# Altium PCB PCB1.PcbDoc
Units mil, origin at the board's own origin, x right, y up, seen from the top; angles counter-clockwise.
Board outline 1989.03 x 1762.03 mil, 2 copper layers (Top Layer, Bottom Layer); 10 components, 18 nets, 219 pads, 0 vias.
Unrouted connection lines stored in the file: 1.
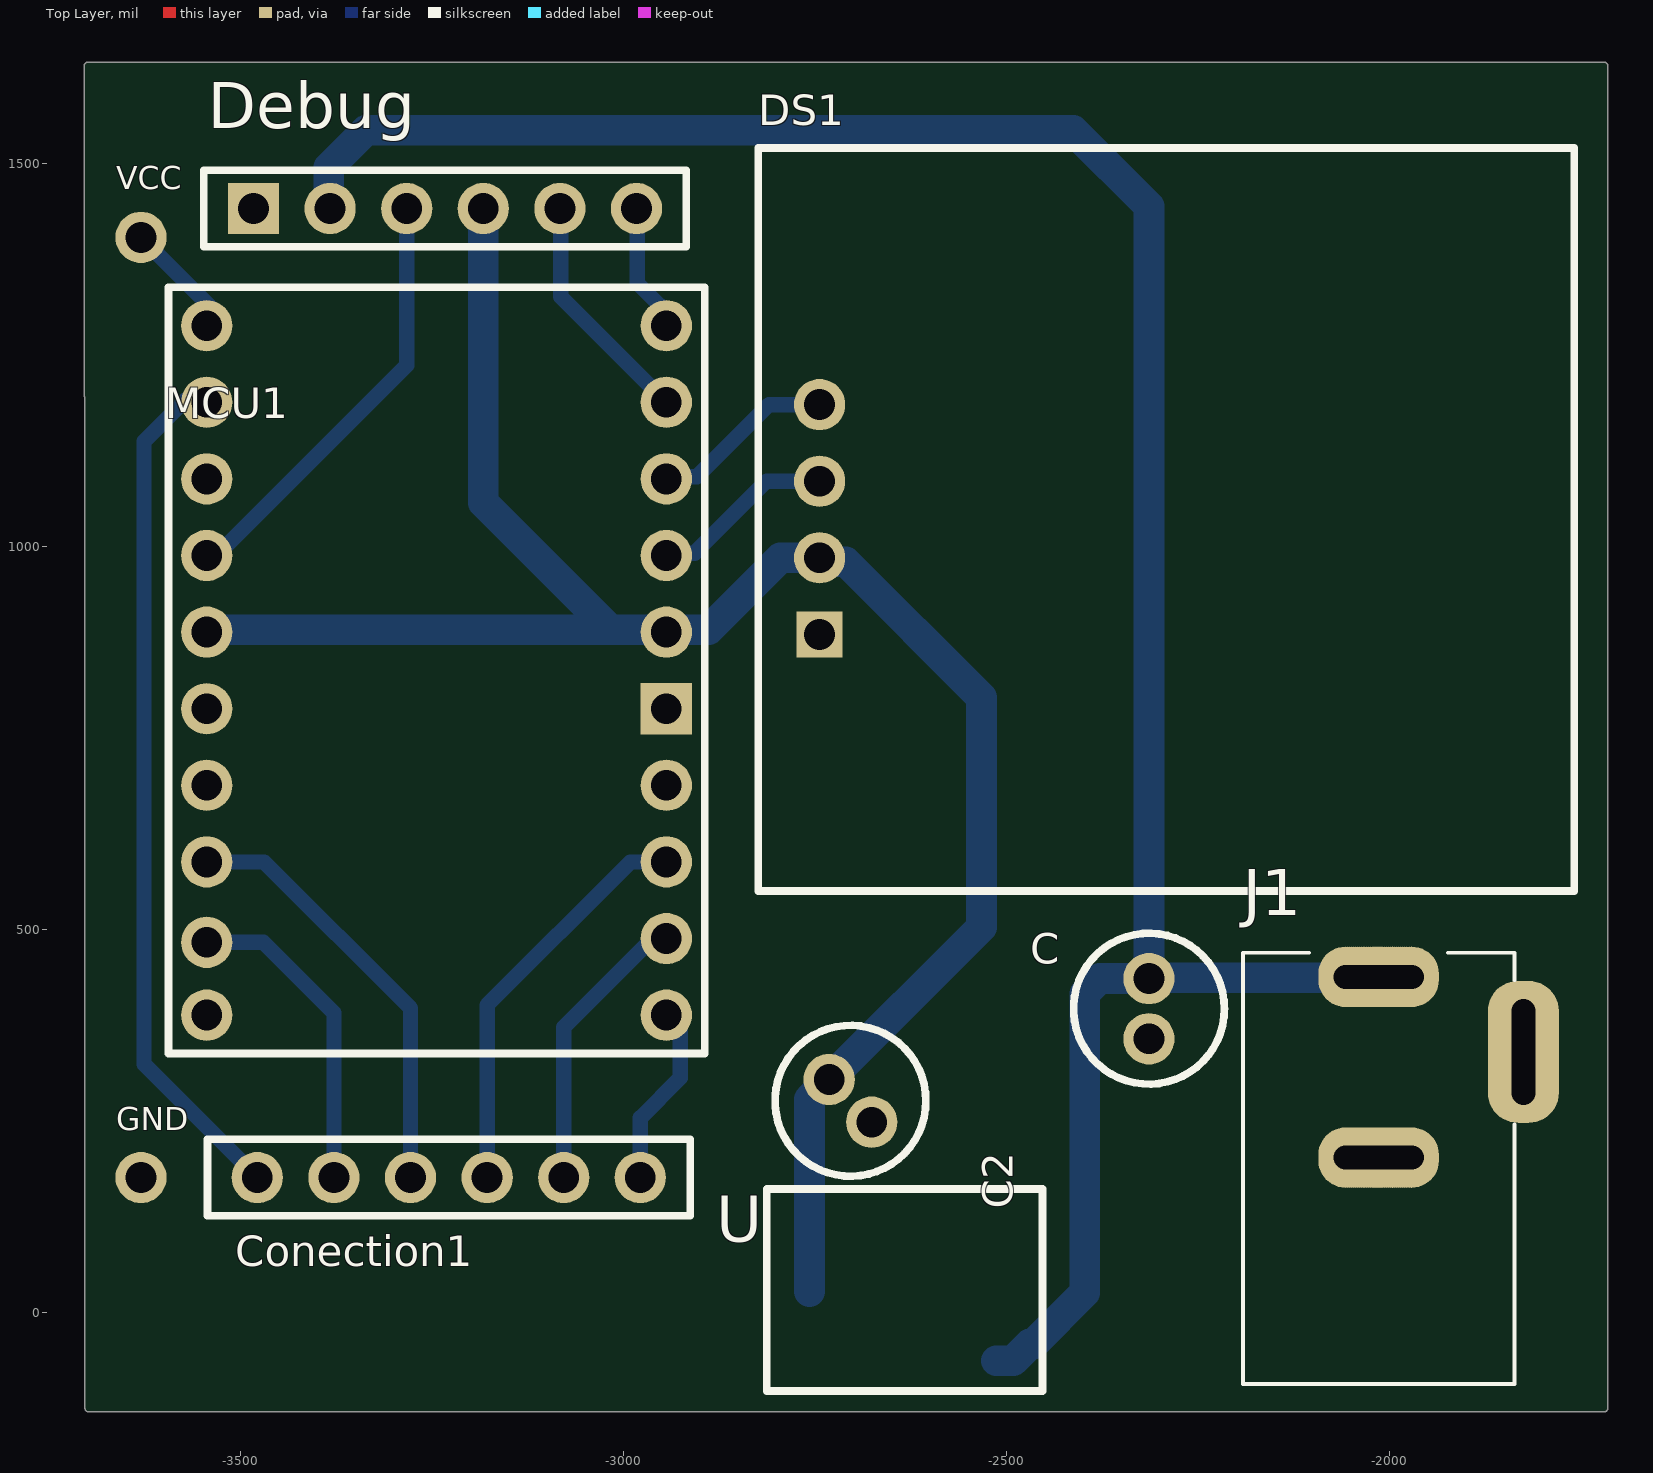
[diagram p0: Top Layer view]
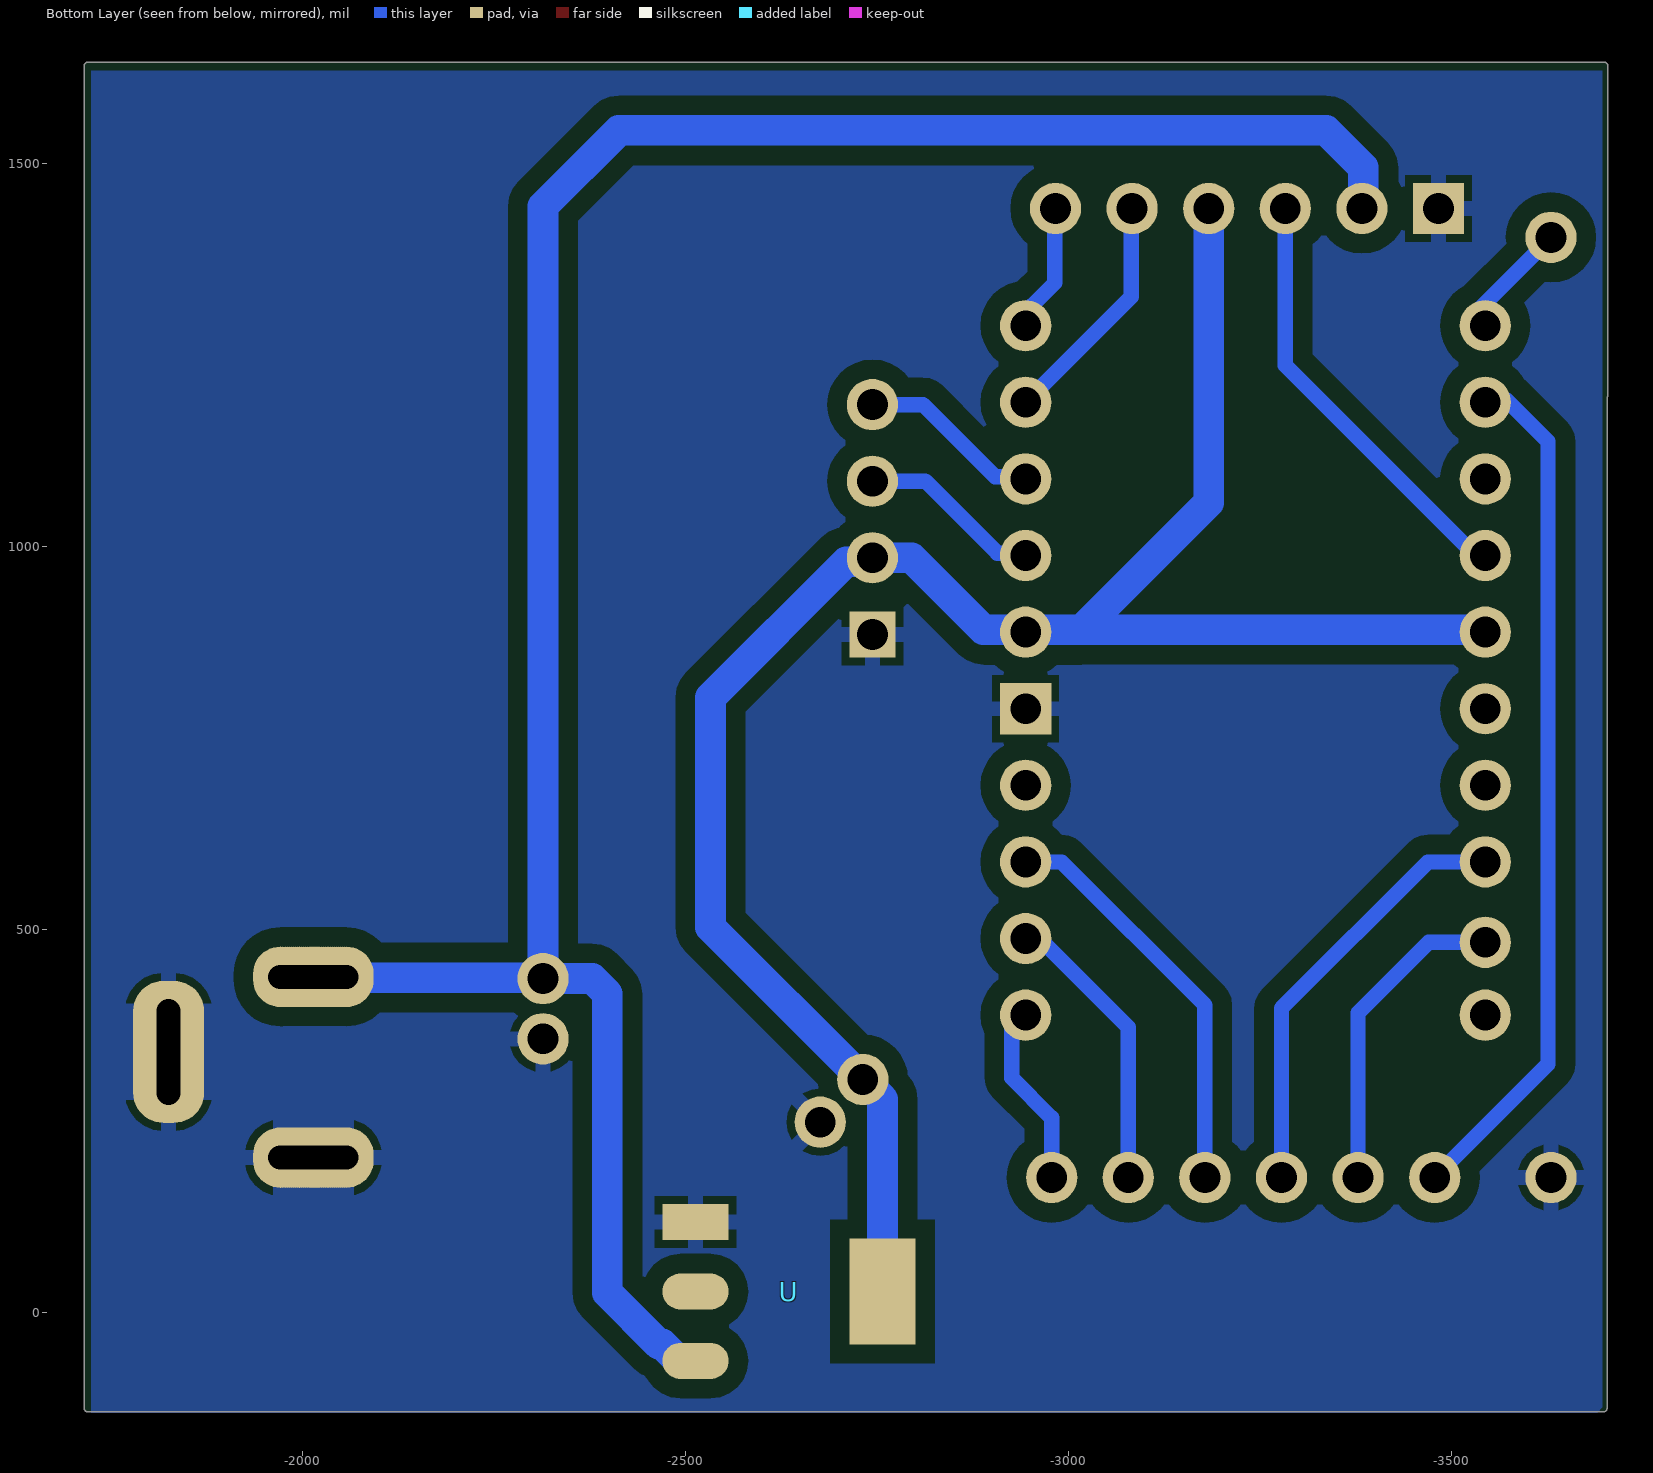
[diagram p1: Bottom Layer view, seen from below]
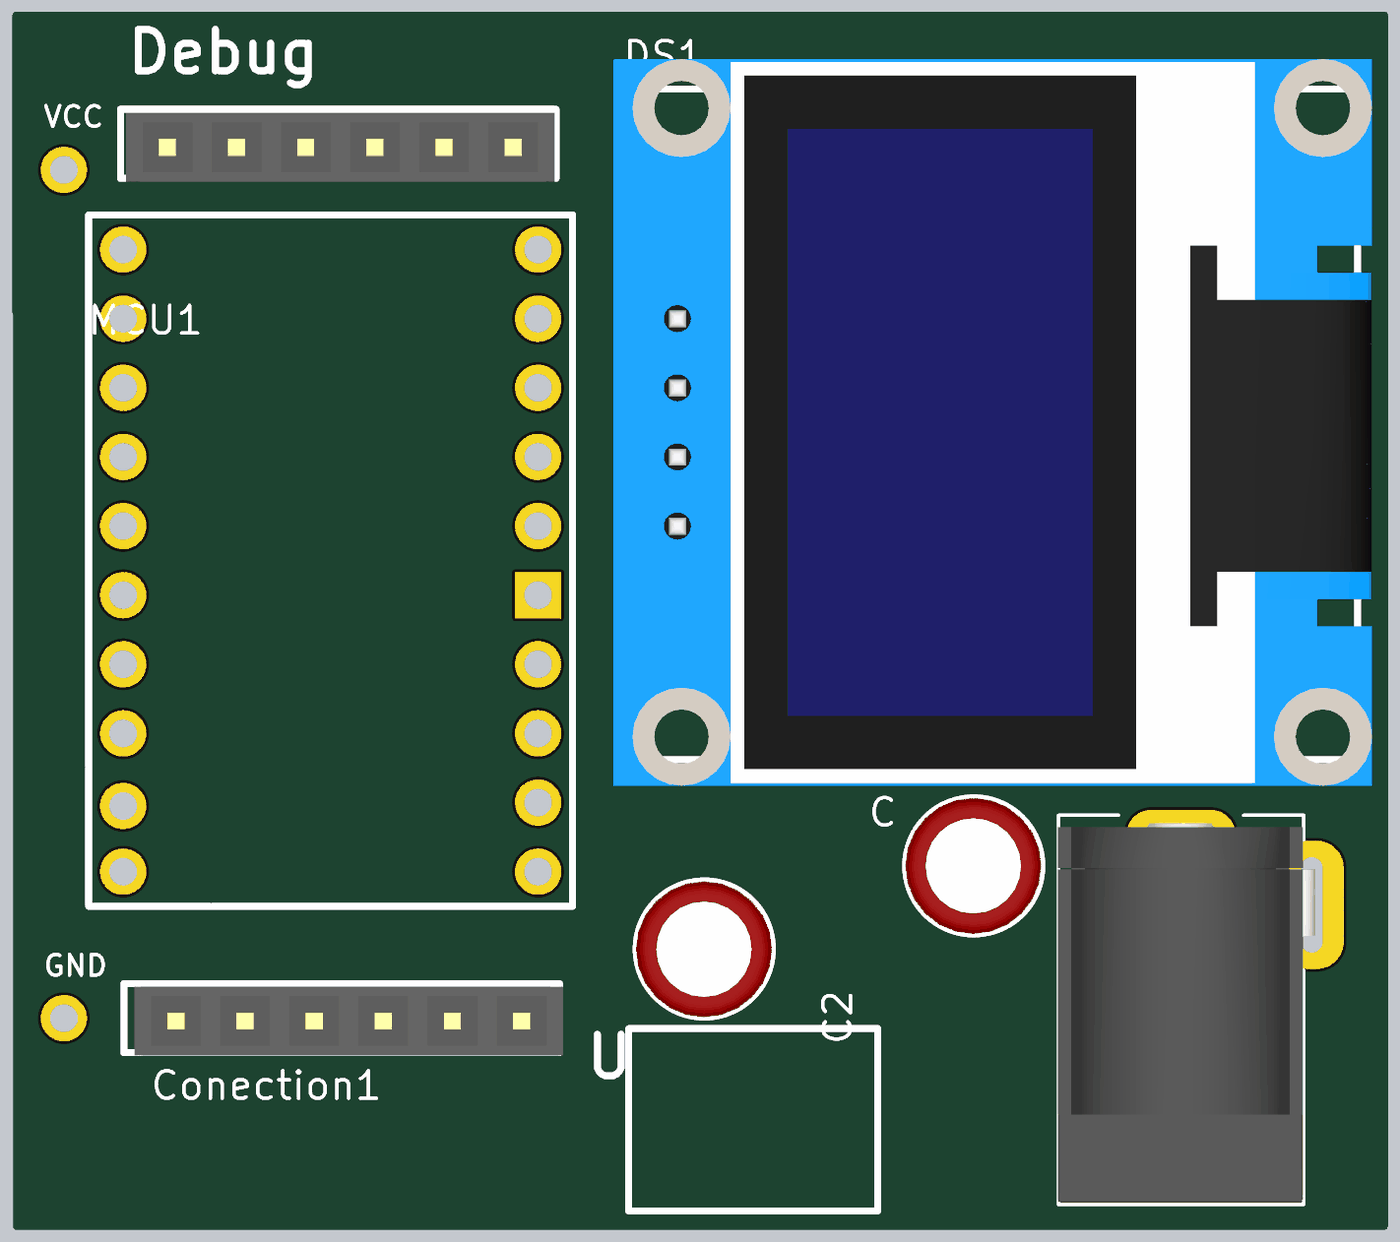
[diagram p2: 3D render of the assembled board from above, using the file's embedded part models]

## Layer stack, top to bottom
Top Solder: solder mask 0.4, Solder Resist, Dk 3.5
Top Layer: signal copper 1.4
Dielectric 1: dielectric 12.6, FR-4, Dk 4.8
Bottom Layer: signal copper 1.4
Bottom Solder: solder mask 0.4, Solder Resist, Dk 3.5

## Board outline
-3703.01,-125 -3703.01,1193.99 cw(c-3699,1197) -3704.01,1197 -3704.01,1627 cw(c-3699,1627) -3699,1632.02 -1720,1632.02 cw(c-1720,1627) -1714.98,1627 -1714.98,-125 cw(c-1720,-125) -1720,-130.01 -3698,-130.01 cw(c-3698,-125)

## Design rules (kind name [scope] priority, off if disabled: settings)
Clearance [All] p1: gap=25 ignorepadtopadclearanceinfootprint=TRUE
HoleToHoleClearance [Not InComponent('J1')] p1: gap=10 allowstackedmicrovias=TRUE
PlaneConnect [InNet('GND')] p1: planeconnectstyle=Relief reliefexpansion=20 reliefentries=4 reliefconductorwidth=20 reliefairgap=10
PolygonConnect [InNet('GND') vs InNet('GND')] p1: connectstyle=Relief reliefconductorwidth=20 reliefentries=4 polygonreliefangle="90 Angle" airgapwidth=10
RoutingVias [All] p1: holewidth=28 width=50 viastyle="Through Hole" minholewidth=28 minwidth=50 maxholewidth=28 maxwidth=50
SolderMaskExpansion [All] p1: expansion=4 istentingtop=FALSE
Width [All] p1: maxlimit=50 minlimit=10 preferedwidth=10 minimp=50.000000 maximp=50.000000 favimp=50.000000
28 further rules are at their usual default settings.

## Components (designator, comment, footprint, x,y, rotation, side; value= is the part's Value field where it differs from the comment)
C "Capacitor Eletrolítico" CAPACITOR -2314,435.74 r270 top value="R$: 0.70 /5 unidades"
C2 "22uF" Capacitor -2731.52,303.99 r315 top value="R$: 0.70 /5 unidades"
Conection1 "Conectionwires" CONECTIONWIRES -2908,216 r180 top
Debug "Debugwires" DEBUGWIRES -2913,1496 r180 top
DS1 "Display 0.96 pol" "DISPLAY OLED" -2744,885 r90 top
GND "Pad" PAD -3629.82,176 r90 top
J1 "DC-005" NINIGI_DC-005 -2189.37,-94 r90 top
MCU1 "Processor" PROCESSOR -3544,388 r0 top
U "AZ1117" AZ1117 -2513,-63.35 r90 top
VCC "Pad" PAD -3629.81,1403.23 r90 top

## Footprints (in the part's own frame and the unit in brackets; to place one, negate y for a bottom-side part, rotate by r counter-clockwise, add the part's x,y. Pads: shape width x height; smd on the part's side, far side on the other; paste and mask are expansions set on the pad)
AZ1117 [mm]
  rect 1.2x2.2 smd far side: GND(4.6,0)
  oval 1.2x2.2 smd far side: V-IN(0,0) V-OUT-1(2.3,0)
  rect 3.5x2.2 smd far side: V-OUT(2.3,6.2)
  silkscreen extent -1,-1.52 5.7,7.62, body extent -0.84,-0.43 5.66,6.57
CAPACITOR [mm]
  round 1.7 hole 1.016: +(0,0) -(2,0)
  silkscreen extent -1.5,-2.5 3.5,2.5, body extent -1.5,-2.51 3.5,2.49, height 11
Capacitor [mm]
  round 1.7 hole 1.016: +(0,0) -(2,0)
  silkscreen extent -1.5,-2.5 3.5,2.5, body extent -1.5,-2.51 3.5,2.49, height 11
CONECTIONWIRES [mm]
  round 1.7 hole 1.02: PA2(9.398,1.016) PA3(11.938,1.016) PA5(1.778,1.016) PA6(4.318,1.016) PA7(6.858,1.016) PF-0(14.478,1.016)
  silkscreen extent 0.13,-0.25 16.13,2.29, body extent 0,-0.15 15.74,2.39, height 8.5
DEBUGWIRES [mm]
  round 1.7 hole 1.02: 3v3(6.858,1.397) PA13(4.318,1.397) PA14(1.778,1.397) RESET(9.398,1.397) VCC(11.938,1.397)
  rect 1.7x1.7 hole 1.02: GND(14.478,1.397)
  silkscreen extent 0.13,0.13 16.13,2.67, body extent 0.18,0.25 15.92,2.79, height 8.5
"DISPLAY OLED" [mm] "24.7x27"
  rect 1.524x1.524 hole 1.02: GND(0,0)
  round 1.7 hole 1.02: SCK(5.08,0) SDA(7.62,0) VCC(2.54,0)
  silkscreen extent -8.51,-25.02 16.13,2.03, body extent -9.46,-25.55 17.24,2.31, height 5.47
NINIGI_DC-005 [mm]
  oval 2x2.35 hole 0.8: 2(9.667,-9.25) 2(9.738,-9.25) 2(9.81,-9.25) 2(9.882,-9.25) 2(9.946,-9.25) 2(10.018,-9.25) 2(10.09,-9.25) 2(10.162,-9.25) 2(10.225,-9.25) 2(10.297,-9.25) 2(10.369,-9.25) 2(10.441,-9.25) 2(10.505,-9.25) 2(10.577,-9.25) 2(10.649,-9.25) 2(10.721,-9.25) 2(10.784,-9.25) 2(10.856,-9.25) 2(10.928,-9.25) 2(11,-9.25) 2(11.064,-9.25) 2(11.135,-9.25) 2(11.207,-9.25) 2(11.279,-9.25) 2(11.343,-9.25) 2(11.415,-9.25) 2(11.487,-9.25) 2(11.559,-9.25) 2(11.622,-9.25) 2(11.694,-9.25) 2(11.766,-9.25) 2(11.838,-9.25) 2(11.902,-9.25) 2(11.974,-9.25) 2(12.046,-9.25) 2(12.118,-9.25) 2(12.181,-9.25) 2(12.253,-9.25) 2(12.329,-9.25) 2(12.355,-9.25) 2(12.38,-9.25)
  oval 2x1.8 hole 0.8: 3(7.518,-5.546) 3(7.518,-5.525) 3(7.518,-5.457) 3(7.518,-5.457) 3(7.518,-5.389) 3(7.518,-5.389) 3(7.518,-5.321) 3(7.518,-5.321) 3(7.518,-5.253) 3(7.518,-5.253) 3(7.518,-5.185) 3(7.518,-5.185) 3(7.518,-5.117) 3(7.518,-5.117) 3(7.518,-5.049) 3(7.518,-5.049) 3(7.518,-4.981) 3(7.518,-4.913) 3(7.518,-4.9) 3(7.518,-4.832) 3(7.518,-4.764) 3(7.518,-4.764) 3(7.518,-4.696) 3(7.518,-4.696) 3(7.518,-4.628) 3(7.518,-4.628) 3(7.518,-4.586) 3(7.518,-4.56) 3(7.518,-4.56) 3(7.518,-4.518) 3(7.518,-4.492) 3(7.518,-4.492) 3(7.518,-4.45) 3(7.518,-4.45) 3(7.518,-4.424) 3(7.518,-4.424) 3(7.518,-4.381) 3(7.518,-4.381) 3(7.518,-4.356) 3(7.518,-4.313) 3(7.518,-4.313) 3(7.518,-4.288) 3(7.518,-4.245) 3(7.518,-4.245) 3(7.518,-4.177) 3(7.518,-4.177) 3(7.518,-4.109) 3(7.518,-4.109) 3(7.518,-4.041) 3(7.518,-3.973) 3(7.518,-3.961) 3(7.518,-3.893) 3(7.518,-3.825) 3(7.518,-3.825) 3(7.518,-3.757) 3(7.518,-3.756) 3(7.518,-3.689) 3(7.518,-3.689) 3(7.518,-3.621) 3(7.518,-3.62) 3(7.518,-3.552) 3(7.518,-3.552) 3(7.518,-3.484) 3(7.518,-3.484) 3(7.518,-3.416) 3(7.518,-3.348) 4(13.513,-5.546) 4(13.513,-5.525) 4(13.513,-5.457) 4(13.513,-5.457) 4(13.513,-5.389) 4(13.513,-5.389) 4(13.513,-5.321) 4(13.513,-5.321) 4(13.513,-5.253) 4(13.513,-5.253) 4(13.513,-5.185) 4(13.513,-5.185) 4(13.513,-5.117) 4(13.513,-5.117) 4(13.513,-5.049) 4(13.513,-5.049) 4(13.513,-4.981) 4(13.513,-4.913) 4(13.513,-4.9) 4(13.513,-4.832) 4(13.513,-4.764) 4(13.513,-4.764) 4(13.513,-4.696) 4(13.513,-4.696) 4(13.513,-4.628) 4(13.513,-4.628) 4(13.513,-4.586) 4(13.513,-4.56) 4(13.513,-4.56) 4(13.513,-4.518) 4(13.513,-4.492) 4(13.513,-4.492) 4(13.513,-4.45) 4(13.513,-4.45) 4(13.513,-4.424) 4(13.513,-4.424) 4(13.513,-4.381) 4(13.513,-4.381) 4(13.513,-4.356) 4(13.513,-4.313) 4(13.513,-4.313) 4(13.513,-4.288) 4(13.513,-4.245) 4(13.513,-4.245) 4(13.513,-4.177) 4(13.513,-4.177) 4(13.513,-4.109) 4(13.513,-4.109) 4(13.513,-4.041) 4(13.513,-3.973) 4(13.513,-3.961) 4(13.513,-3.893) 4(13.513,-3.825) 4(13.513,-3.825) 4(13.513,-3.757) 4(13.513,-3.756) 4(13.513,-3.689) 4(13.513,-3.689) 4(13.513,-3.621) 4(13.513,-3.62) 4(13.513,-3.552) 4(13.513,-3.552) 4(13.513,-3.484) 4(13.513,-3.484) 4(13.513,-3.416) 4(13.513,-3.348)
  silkscreen extent 0.01,-8.95 14.31,0.05, body extent 0.09,-9.37 14.02,0.08, height 11.2
PAD [mm] "A simple pad to connections"
  round 1.7 hole 1.02: Pad(0,0)
PROCESSOR [mm]
  round 1.7 hole 1.02: 3v3(0,12.7) 3v3(15.24,12.7) BOOT0(0,22.86) NRST(0,15.24) PA0(0,10.16) PA1(0,7.62) PA2(0,5.08) PA3(0,2.413) PA4(0,0) PA5(15.24,0) PA6(15.24,2.54) PA7(15.24,5.08) PA9(15.24,15.24) PA10(15.24,17.78) PA13(15.24,20.32) PA14(15.24,22.86) PB1(15.24,7.62) PF0(0,20.32) PF1(0,17.78)
  rect 1.7x1.7 hole 1.02: GND(15.24,10.16)
  silkscreen extent -1.27,-1.27 16.51,24.13, body extent -1.32,-1.22 16.51,24.08, height 1.27

## Part data
C2: library part "Capacitor Eletrolítico", Availability=Avaliable, Datasheet_link=https://www.electron.com/electrolytic-capacitor-jamicon-skr220m1ed11m-p1278/, Link_Autocore=https://www.autocorerobotica.com.br/capacitor-eletrolitico-22uf-25v-kit-com-5-unidades
Conection1: "6 out", buy=https://www.autocorerobotica.com.br/barra-pinos-macho-180, Dimensões=https://www.autocorerobotica.com.br/barra-de-40-pinos-femea-x5-unidades
Debug: "2 in", buy=https://www.autocorerobotica.com.br/barra-de-40-pinos-femea-x5-unidades
DS1: library part "Display oled", "0.96 pol 24.7x27 cm", Informations="Display oled 0.96 pol 128x64", link_mercadolivre=https://produto.mercadolivre.com.br/MLB-1549862447-display-oled-096-azul-amarelo-i2c-128x64-arduino-raspberry-_JM?quantity=1#position=4&type=item&tracking_id=dc610daf-3617-4627-bdd2-8ae4acf904ab, link to buy and measurements=https://pt.aliexpress.com/item/32896971385.html?spm=a2g0o.productlist.0.0.6ecd7bb88K6sVT&algo_pvid=5cb829e2-0bf1-4f55-8bae-71a0ff6fa1f2&algo_expid=5cb829e2-0bf1-4f55-8bae-71a0ff6fa1f2-0&btsid=0ab50f6215875744850722033e6e98&ws_ab_test=searchweb0_0,searchweb201602_,searchweb201603_
J1: "Polymeric PTC Resettable Fuse 15V 50mA Ih Surface Mount 0603 _1608 Metric_, Concave", Package="0603 Ninigi", Availability=Unavailable, link_mercadolivre=https://produto.mercadolivre.com.br/MLB-1497128338-10-pecas-jack-j4-21mm-para-placa-plug-p4-arduino-_JM?quantity=1#position=1&type=item&tracking_id=8412b441-44a9-4b74-b006-990053047356, MF="Littelfuse Inc.", MP=DC-005, Price=None, SnapEDA_Link=https://www.snapeda.com/parts/DC-005/Littelfuse%20Inc./view-part/2874446/?ref=snap
MCU1: "Processor arm Stm32f0xx", Adapter="SOP20 TO DIP20", Link to buy=https://www.autocorerobotica.com.br/adaptador-sop20-ssop20-tssop20-smd-para-dip-20, Measurements link=https://alltopnotch.co.uk/product/2-x-sop20-s020-soic20-tssop20-msop20-to-dip20-adapter-board-smd-breakout/
U: "Converter 5v to 3.3v", Availability=Avaliable, Datasheet_link=https://www.digikey.com/en/datasheets/diodes-incorporated/diodes-incorporated-az1117c, Fornecimento="5 unidades dadas pelo LESC", Link_to_buy=https://produto.mercadolivre.com.br/MLB-1647161150-transistor-az1117-25tre1-az1117-25-1117-25-kit-5-pecas-_JM#position=1&type=item&tracking_id=ce52b624-396d-47aa-8cab-d923e44ab95b, Price="R$ 34.00 / 50 unidades"
C: Availability=Avaliable, Datasheet_link=https://www.electron.com/electrolytic-capacitor-jamicon-skr220m1ed11m-p1278/, Link_Autocore=https://www.autocorerobotica.com.br/capacitor-eletrolitico-22uf-25v-kit-com-5-unidades

## Nets (pads, with @x,y where several pads share a name; then routed paths per layer and width w, separated by ;. In a path a pad name is that pad's centre, name@x,y a point inside that pad or via, vN(x,y) a via of type N, cw(c..) or ccw(c..) an arc to the next point about the centre after c; other vN are vias at no path point)
BOOT0: MCU1.BOOT0 VCC.Pad | length 154.4
  Bottom Layer w20: VCC.Pad -3528,1301.42 MCU1.BOOT0@-3528,1291
GND: C2.- C.- Debug.GND DS1.GND GND.Pad J1.2 J1.3 MCU1.GND U.GND
NRST: Debug.RESET MCU1.NRST | length 551.5
  Bottom Layer w20: MCU1.NRST@-3528,991 -3283,1236 Debug.RESET
PA0: MCU1.PA0
PA1: MCU1.PA1
PA2: Conection1.PA2 MCU1.PA2 | length 550.1
  Bottom Layer w20: MCU1.PA2@-3528,588 -3469,588 -3278,397 Conection1.PA2
PA3: Conection1.PA3 MCU1.PA3 | length 401.1
  Bottom Layer w20: MCU1.PA3@-3526,483 -3470,483 -3378,391 Conection1.PA3
PA4: MCU1.PA4
PA5: Conection1.PA5 MCU1.PA5 | length 236.5
  Bottom Layer w20: Conection1.PA5 -2978,254 -2926,306 MCU1.PA5@-2926,391
PA6: Conection1.PA6 MCU1.PA6 | length 396
  Bottom Layer w20: Conection1.PA6 -3078,372 -2962,488 MCU1.PA6@-2926,488
PA7: Conection1.PA7 MCU1.PA7 | length 554.5
  Bottom Layer w20: Conection1.PA7 -3178,401 -2991,588 MCU1.PA7@-2926,588
PA9: DS1.SCK MCU1.PA9 | length 222.9
  Bottom Layer w20: MCU1.PA9@-2928,991 -2907,991 -2813,1085 DS1.SCK
PA10: DS1.SDA MCU1.PA10 | length 222.9
  Bottom Layer w20: MCU1.PA10@-2928,1091 -2904,1091 -2810,1185 DS1.SDA
PA13: Debug.PA13 MCU1.PA13 | length 328.2
  Bottom Layer w20: Debug.PA13@-3082,1441 -3082,1326 MCU1.PA13 MCU1.PA13@-2926,1188
PA14: Debug.PA14 MCU1.PA14 | length 176.2
  Bottom Layer w20: Debug.PA14@-2982,1441 -2982,1344 MCU1.PA14@-2926,1288
PF-0: Conection1.PF-0 MCU1.PF0 | length 1142.7
  Bottom Layer w20: MCU1.PF0@-3528,1191 -3572,1191 -3626,1137 -3626,324 Conection1.PF-0
VCC: C2.+ Debug.3v3 DS1.VCC MCU1.3v3 U.V-OUT | length 2597
  Bottom Layer w40: MCU1.3v3@-3528,891 -3017,891 ; Debug.3v3 -3183,1057 -3017,891 ; U.V-OUT -2757.09,278.41 C2.+ -2532.69,502.82 -2532.69,802.69 -2709.85,979.85 -2738.85,979.85 DS1.VCC -2795,985 -2889,891 -2944,891 -3017,891
VCC-IN: C.+ Debug.VCC J1.4 U.V-IN | length 3101.7
  Bottom Layer w10: C.+ C.+@-2312.87,436.87 ; J1.4@-2042.6,436.87 J1.4@-2041.47,438
  Bottom Layer w40: Debug.VCC@-3384.85,1441 -3384.85,1494.65 -3336.5,1543 -2413,1543 -2314,1444 C.+ -2378.26,435.74 -2398,416 -2398,25.47 -2464.89,-41.42 -2469.43,-41.42 -2491.35,-63.35 U.V-IN ; C.+@-2312.87,436.87 J1.4@-2042.6,436.87
pads on no net: MCU1.PB1 MCU1.PF1 U.V-OUT-1

## Polygon pours and split planes (outlines as drawn)
GND on Bottom Layer "Top Layer-No Net 2" (solid, remove dead copper, pour order 12): -3697,1621 -1724,1621 -1724,-131 -3690,-131 -3697,-124

## Silkscreen, mask and mechanical layers (free items; w line width, h text height)
Mechanical 1:
  lines w10: -3699,1197 -3699,1627 -1720,1627 -1720,-125 -3698,-125 -3698,310 -3698,1196 -3699,1197